# EAGLE board NitroxAnalyzer_v2 (EAGLE 7.3.0)
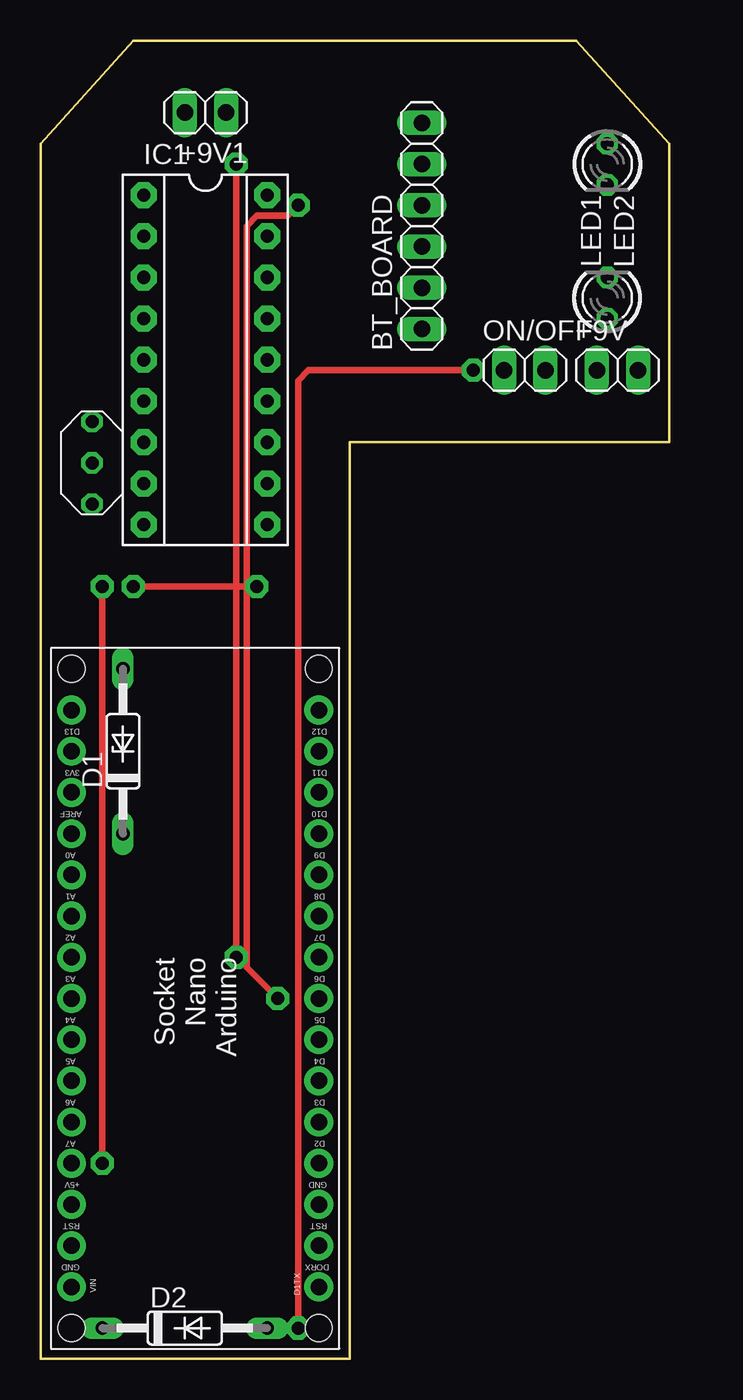
[diagram p0: board, top side]
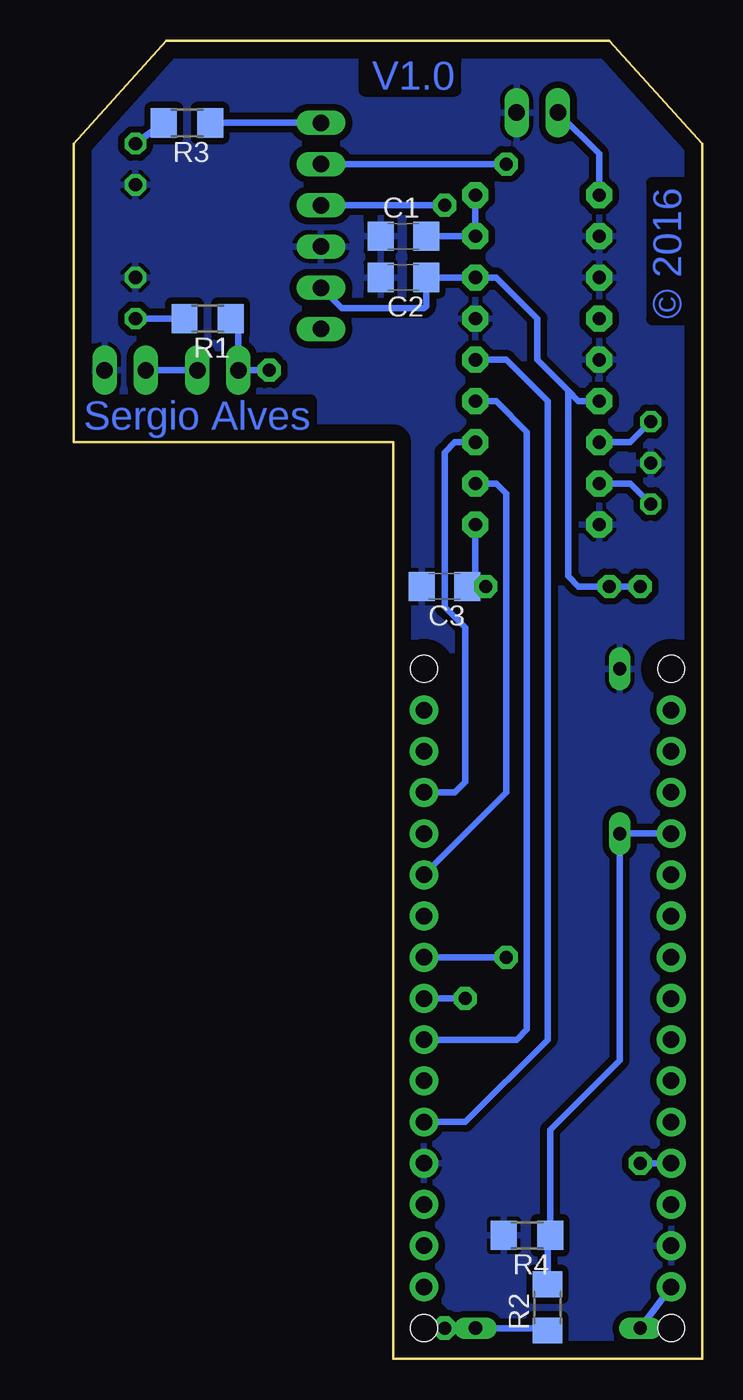
[diagram p1: board, bottom side, seen from below]

Size 38.73 x 81.28 mm. Coordinates in mm from the lower left corner, seen from the top.
Outline: 0,0 19.05,0 19.05,56.52 38.73,56.52 38.73,74.93 33.02,81.28 5.71,81.28 0,74.93 0,0
Copper layers (1*16): Top 0.035mm / dielectric 1.5mm / Bottom 0.035mm
Design rules "default *": minimum track width 10mil, minimum drill 24mil, track to track 16mil, track to pad 16mil, pad to pad 16mil, via to via 16mil, smd to smd 8mil, copper to edge 40mil, drill to drill 8mil, minimum pad ring 10mil, minimum via ring 8mil, stop-mask expansion 4mil, vias tented up to drill 0mil, thermal gap 10mil

## Footprints (pad centres in the part's own frame; a part is rotated, then mirrored left to right if it is on the bottom)
1X02 = drill 1.016 long: 1 -1.27,0; 2 1.27,0
1X06 = drill 1.016 long: 1 -6.35,0; 2 -3.81,0; 3 -1.27,0; 4 1.27,0; 5 3.81,0; 6 6.35,0
C1206 = smd 1.6 x 1.8: 1 -1.4,0; 2 1.4,0
DO35Z10 = drill 0.813 long: A 5.08,0; C -5.08,0
DO35-10 = drill 0.813 long: A 5.08,0; C -5.08,0
DIL18 = drill 0.813 pad 1.6 octagon: 1 -10.16,-3.81; 2 -7.62,-3.81; 3 -5.08,-3.81; 4 -2.54,-3.81; 5 0,-3.81; 6 2.54,-3.81; 7 5.08,-3.81; 8 7.62,-3.81; 9 10.16,-3.81; 10 10.16,3.81; 11 7.62,3.81; 12 5.08,3.81; 13 2.54,3.81; 14 0,3.81; 15 -2.54,3.81; 16 -5.08,3.81; 17 -7.62,3.81; 18 -10.16,3.81
LED3MM = drill 0.813 octagon: A -1.27,0; K 1.27,0
ARDUINO_NANO_SOCKET = drill 1.016 pad 1.778: 3V3 6.35,1.27; 5V 31.75,1.27; A0 11.43,1.27; A1 13.97,1.27; A2 16.51,1.27; A3 19.05,1.27; A4 21.59,1.27; A5 24.13,1.27; A6 26.67,1.27; A7 29.21,1.27; D2 29.21,16.51; D3 26.67,16.51; D4 24.13,16.51; D5 21.59,16.51; D6 19.05,16.51; D7 16.51,16.51; D8 13.97,16.51; D9 11.43,16.51; D10 8.89,16.51; D11 6.35,16.51; D12 3.81,16.51; D13 3.81,1.27; GND 31.75,16.51; GND. 36.83,1.27; REF 8.89,1.27; RST 34.29,16.51; RST. 34.29,1.27; RX1 36.83,16.51; TX1 39.37,16.51; VIN 39.37,1.27 | hole 1.651: 1.27,1.27; 1.27,16.51; 41.91,16.51; 41.91,1.27
R1206 = smd 1.6 x 1.803: 1 -1.422,0; 2 1.422,0
RESONATOR = drill 0.8 octagon: P$1 -2.54,0; P$2 0,0; P$3 2.54,0

## Placement (x,y rotation side)
+9V  BAT_CON  [1X02]  35.56,60.96 0 top
+9V1  BAT_CON  [1X02]  10.16,76.83 180 top
BT_BOARD  [1X06]  23.5,69.85 90 top
C1  1uF  [C1206]  18.41,69.22 0 bottom
C2  1uF  [C1206]  18.41,66.67 180 bottom
C3  1uF  [C1206]  15.88,47.62 180 bottom
D1  BZX55  [DO35Z10]  5.08,37.47 90 top
D2  BA221  [DO35-10]  8.89,1.91 0 top
IC1  ADS1210P  [DIL18]  10.16,61.59 270 top
LED1  [LED3MM]  34.92,65.41 90 top
LED2  [LED3MM]  34.92,73.66 270 top
ON/OFF  BAT_CON  [1X02]  29.84,60.96 0 top
PCB1  ARDUINO_NANO_SOCKET  [ARDUINO_NANO_SOCKET]  0.64,43.81 270 top
R1  [R1206]  30.48,64.14 180 bottom
R2  6K  [R1206]  9.53,3.17 90 bottom
R3  [R1206]  31.75,76.2 180 bottom
R4  6K  [R1206]  10.79,7.62 180 bottom
U$2  RESONATOR  [RESONATOR]  3.17,55.24 270 top

## Library data of the parts
+9V +9V1 BT_BOARD ON/OFF = pinhead
C1-C3 R1-R4 = rcl
D1 D2 = diode
IC1 = burr-brown
LED1 LED2 = led
PCB1 = arduino-sockets
U$2 = resonator

## Nets
+9V: D2.A ON/OFF.1 R1.1 R2.1
/DRDY: IC1.14 PCB1.D2
ARDUINO_IN_ADS1210_OUT: IC1.13 PCB1.D4
ARDUINO_OUT_ADS1210_IN: IC1.12 PCB1.D10
BATTERY_ANALOG: D1.C PCB1.A0 R2.2 R4.1
BT_RXD: BT_BOARD.5 PCB1.D6
BT_STATE: BT_BOARD.6 R3.1
BT_TXD: BT_BOARD.4 PCB1.D5
BT_WAKEUP: BT_BOARD.1
GND: +9V1.1 +9V.2 BT_BOARD.3 C1.1 C2.2 C3.2 D1.A IC1.2 IC1.3 IC1.5 IC1.9 IC1.15 LED1.K LED2.K PCB1.GND PCB1.GND. R4.2 U$2.P$2
N$1: D2.C PCB1.VIN
N$2: LED1.A R1.2
N$3: LED2.A R3.2
N$5: +9V.1 ON/OFF.2
O2_CELL_INPUT: +9V1.2 IC1.1
REFIN-OUT: C1.2 IC1.17 IC1.18
SCLK: IC1.11 PCB1.D8
VCC: BT_BOARD.2 C2.1 C3.1 IC1.6 IC1.10 IC1.16 PCB1.5V
XIN: IC1.7 U$2.P$1
XOUT: IC1.8 U$2.P$3

## Tracks (layer width: path | path; a pad name or v marks a point on that pad's centre or on a via)
+9V  (via drill 0.8 pad 1.42)
  Top 0.406: v26.67,60.96 16.51,60.96 15.88,60.33 v15.88,1.91
  Bottom 0.406: v26.67,60.96 ON/OFF.1 28.57,63.65 R1.1 | v15.88,1.91 D2.A 10.31,1.91 R2.1
/DRDY
  Bottom 0.406: IC1.14 12.06,61.59 9.53,59.05 9.53,19.68 14.61,14.61 PCB1.D2
ARDUINO_IN_ADS1210_OUT
  Bottom 0.406: PCB1.D4 11.43,19.68 10.79,20.32 10.79,57.15 12.7,59.05 IC1.13
ARDUINO_OUT_ADS1210_IN
  Bottom 0.406: PCB1.D10 15.24,34.92 14.61,35.56 14.61,45.09 15.88,46.35 15.88,55.88 15.24,56.52 IC1.12
BATTERY_ANALOG
  Bottom 0.406: PCB1.A0 D1.C 5.08,18.41 9.37,14.12 R4.1 9.53,7.47 R2.2
BT_RXD  (via drill 0.8 pad 1.42)
  Top 0.406: v12.06,73.66 v12.06,24.77
  Bottom 0.406: BT_BOARD.5 v12.06,73.66 | v12.06,24.77 PCB1.D6
BT_STATE
  Bottom 0.406: BT_BOARD.6 R3.1
BT_TXD  (via drill 0.8 pad 1.42)
  Top 0.406: v14.61,22.23 12.7,24.13 12.7,69.85 13.34,70.48 15.24,70.48 v15.88,71.12
  Bottom 0.406: PCB1.D5 v14.61,22.23 | v15.88,71.12 BT_BOARD.4
GND
  pour Bottom: -0.64,-0.64 19.68,-0.64 19.68,55.88 39.37,55.88 39.37,74.93 33.02,81.92 5.71,81.92 -0.64,74.93
N$1
  Bottom 0.406: PCB1.VIN D2.C
N$2
  Bottom 0.406: R1.2 LED1.A
N$3
  Bottom 0.406: R3.2 LED2.A
N$5
  Bottom 0.406: ON/OFF.2 +9V.1
O2_CELL_INPUT
  Bottom 0.406: IC1.1 6.35,74.3 +9V1.2
REFIN-OUT
  Bottom 0.406: C1.2 IC1.17 IC1.18
SCLK
  Bottom 0.406: PCB1.D8 12.06,34.92 12.06,53.34 12.7,53.98 IC1.11
VCC  (via drill 0.8 pad 1.42)
  Top 0.406: v13.34,47.62 v5.71,47.62 | v3.81,47.62 v3.81,12.06
  Bottom 0.406: v3.81,12.06 PCB1.5V | IC1.6 7.62,59.05 8.26,59.69 | 8.26,59.69 10.16,61.59 10.16,64.14 12.7,66.67 IC1.16 C2.1 17.02,64.9 17.14,64.77 22.23,64.77 BT_BOARD.2 | 8.26,59.69 8.26,48.26 7.62,47.62 v5.71,47.62 v3.81,47.62 | v13.34,47.62 13.97,47.62 | 13.97,47.62 C3.1 | IC1.10 13.97,47.62
XIN
  Bottom 0.406: U$2.P$1 4.45,56.52 IC1.7
XOUT
  Bottom 0.406: U$2.P$3 4.45,53.98 IC1.8

## Text on the board
Bottom: V1.0 | © 2016 | Sergio Alves